# EAGLE board hw (EAGLE 9.0.0)
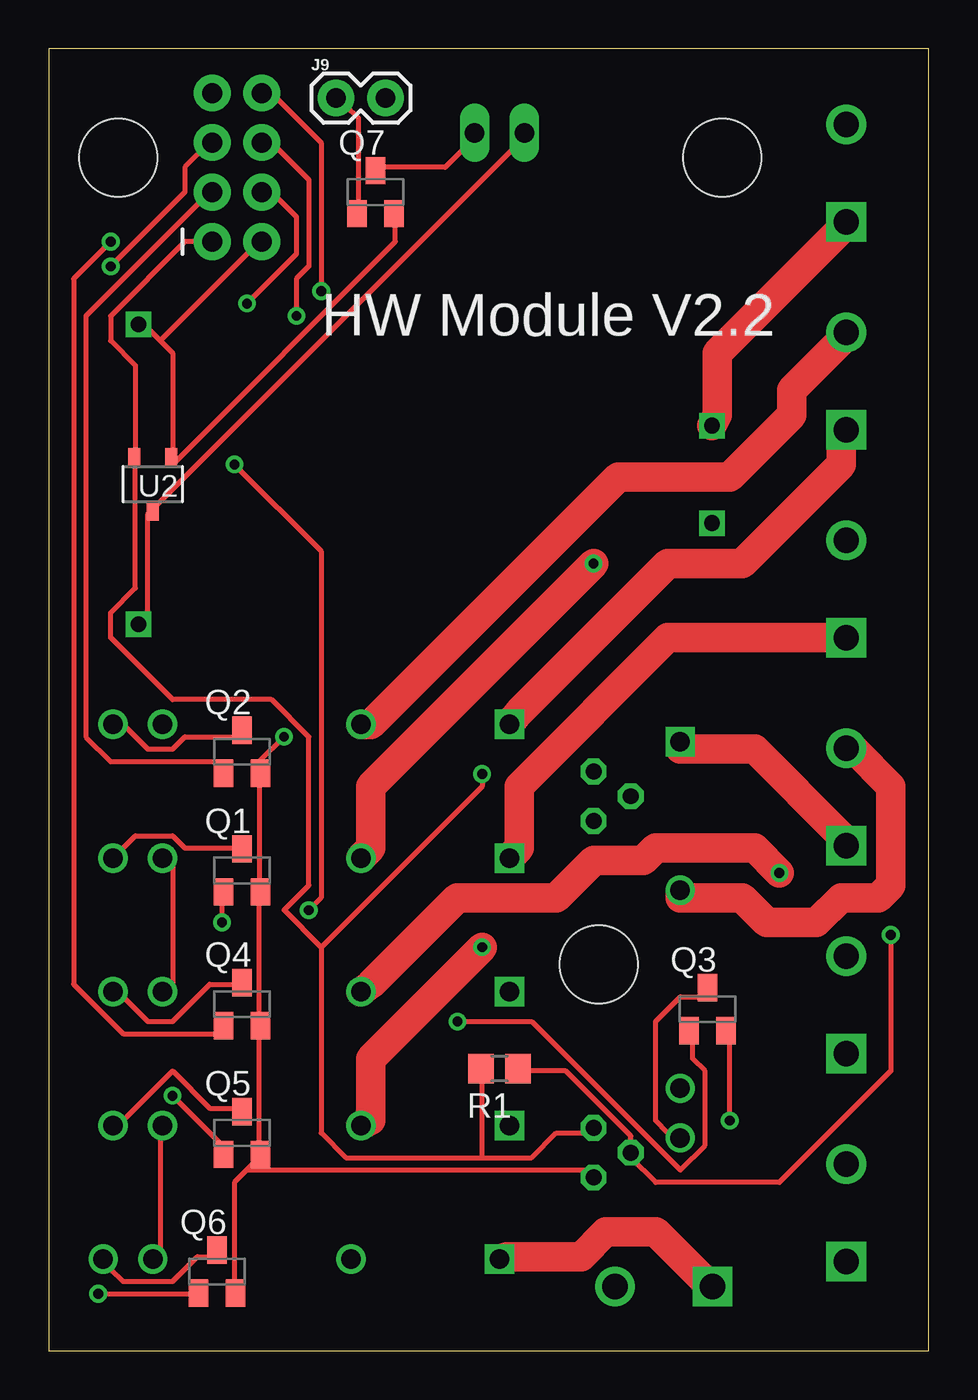
[diagram p0: board, top side]
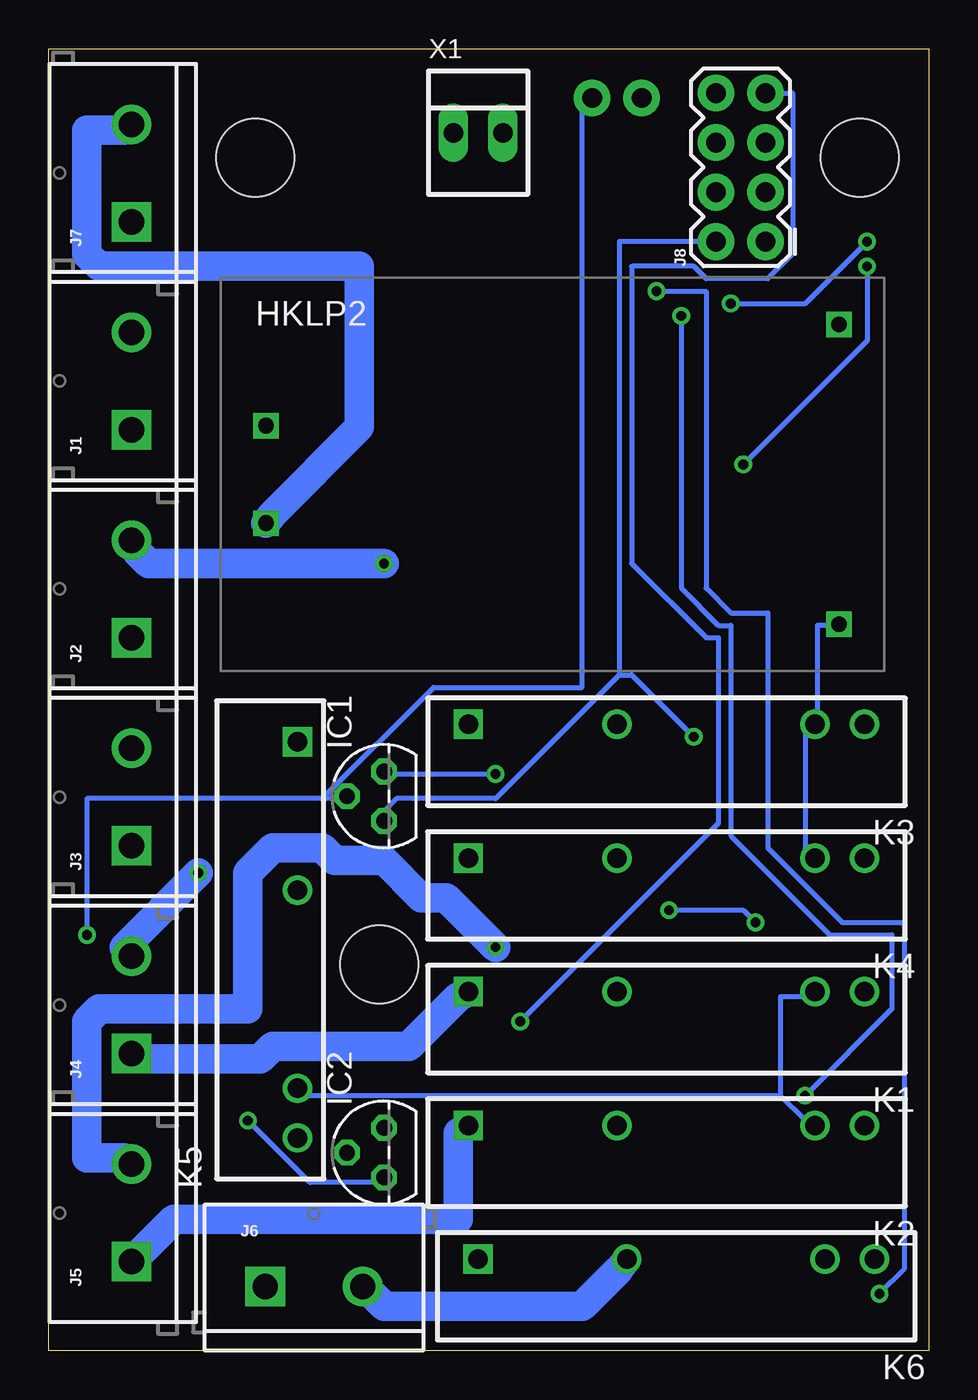
[diagram p1: board, bottom side, seen from below]

Size 45.14 x 66.79 mm. Coordinates in mm from the lower left corner, seen from the top.
Outline: 0,0 45.14,0 45.14,66.79 0,66.79 0,0
Copper layers (1*16): Top 0.035mm / dielectric 1.5mm / Bottom 0.035mm
Design rules "default *": minimum track width 6mil, minimum drill 0.5mm, track to track 6mil, track to pad 6mil, pad to pad 6mil, via to via 6mil, smd to smd 6mil, copper to edge 40mil, drill to drill 6mil, minimum pad ring 10mil, minimum via ring 8mil, stop-mask expansion 4mil, vias tented up to drill 0mil, thermal gap 10mil
Net classes: 0 default: width 0.254 mm, clearance 0.254 mm; 1 220v: width 1.524 mm, clearance 0.508 mm
Holes 4 mm at 28.19,19.81 3.56,61.21 34.54,61.21

## Footprints (pad centres in the part's own frame; a part is rotated, then mirrored left to right if it is on the bottom)
HKLPM01 = drill 0.8 square: P$1 -14.7,2.5; P$2 -14.7,-2.5; P$3 14.7,7.7; P$4 14.7,-7.7
TO-92 = drill 0.813 pad 1.27 octagon: 1 -1.27,0; 2 0,1.905; 3 1.27,0
SCREWTERMINAL-5MM-2 = drill 1.3 pad 2.032 square: 1 0,0 | drill 1.3 pad 2.032: 2 5,0
2X4 = drill 1.016 pad 1.88: 1 -3.81,-1.27; 2 -3.81,1.27; 3 -1.27,-1.27; 4 -1.27,1.27; 5 1.27,-1.27; 6 1.27,1.27; 7 3.81,-1.27; 8 3.81,1.27
1X02 = drill 1.016 pad 1.88: 1 0,0; 2 2.54,0
RELAY_G3MB-202P = drill 1 square: 1 10.16,-1.4 | drill 1: 2 2.54,-1.4; 3 -7.62,-1.4; 4 -10.16,-1.4
SOT23-BEC = smd 1 x 1.4: B -0.95,-1.1; C 0,1.1; E 0.95,-1.1
R0805 = smd 1.3 x 1.5: 1 -0.95,0; 2 0.95,0
SOT23A_MICROCHIP_CB = smd 0.6 x 1: 1 -0.95,-1.35; 2 0.95,-1.35; 3 0,1.35
22-23-2021 = drill 1 long: 1 -1.27,0; 2 1.27,0

## Placement (x,y rotation side)
HKLP2  HKLPM01  [HKLPM01]  19.3,44.96 0 bottom
IC1  DS1820  [TO-92]  27.94,28.45 90 bottom
IC2  DS1820  [TO-92]  27.94,10.16 90 bottom
J1  HEAT1  [SCREWTERMINAL-5MM-2]  40.89,47.24 90 bottom
J2  HEAT2  [SCREWTERMINAL-5MM-2]  40.89,36.58 90 bottom
J3  HEAT3  [SCREWTERMINAL-5MM-2]  40.89,25.91 90 bottom
J4  HEAT4  [SCREWTERMINAL-5MM-2]  40.89,15.24 90 bottom
J5  HEAT5  [SCREWTERMINAL-5MM-2]  40.89,4.57 90 bottom
J6  HEAT6  [SCREWTERMINAL-5MM-2]  34.04,3.3 0 bottom
J7  220_IN  [SCREWTERMINAL-5MM-2]  40.89,57.91 90 bottom
J8  [2X4]  9.65,60.71 90 bottom
J9  [1X02]  14.73,64.26 0 top
K1  G3MB-202P  [RELAY_G3MB-202P]  13.46,17.02 180 bottom
K2  G3MB-202P  [RELAY_G3MB-202P]  13.46,10.16 180 bottom
K3  G3MB-202P  [RELAY_G3MB-202P]  13.46,30.73 180 bottom
K4  G3MB-202P  [RELAY_G3MB-202P]  13.46,23.88 180 bottom
K5  G3MB-202P  [RELAY_G3MB-202P]  33.78,21.08 90 bottom
K6  G3MB-202P  [RELAY_G3MB-202P]  12.95,3.3 180 bottom
Q1  BC817-40SMD  [SOT23-BEC]  9.91,24.64 0 top
Q2  BC817-40SMD  [SOT23-BEC]  9.91,30.73 0 top
Q3  BC817-40SMD  [SOT23-BEC]  33.78,17.53 0 top
Q4  BC817-40SMD  [SOT23-BEC]  9.91,17.78 0 top
Q5  BC817-40SMD  [SOT23-BEC]  9.91,11.18 0 top
Q6  BC817-40SMD  [SOT23-BEC]  8.64,4.06 0 top
Q7  BC817-40SMD  [SOT23-BEC]  16.76,59.44 0 top
R1  4k7  [R0805]  23.11,14.48 180 top
U2  MCP1703-3302E/CB  [SOT23A_MICROCHIP_CB]  5.33,44.45 180 top
X1  22-23-2021  [22-23-2021]  23.11,62.48 0 bottom

## Library data of the parts
HKLP2 = HLKPM01EaglesLib
IC1 IC2 = DS1820
J1-J7 = SparkFun-Connectors; SF_SKU: PRT-08432
J8 J9 = SparkFun-Connectors
K1-K6 = G3MB-202P; AVAILABILITY: Unavailable; MF: Omron; MP: G3MB-202P; PACKAGE: None; PRICE: None
Q1-Q7 = transistor-npn
R1 = resistor
U2 = _hhn_MCP1703; SPICEPREFIX: U
X1 = con-molex; MF: MOLEX; MPN: 22-23-2021; OC_FARNELL: 1462926; OC_NEWARK: 25C3832

## Nets
220_GROUND0 [220v]: HKLP2.P$2 J7.2
220_GROUND1 [220v]: J1.2 K3.2
220_GROUND2 [220v]: J2.2 K4.2
220_GROUND3 [220v]: J3.2 K5.2
220_GROUND4 [220v]: J4.2 K1.2
220_GROUND5 [220v]: J5.2 K2.2
220_GROUND6 [220v]: J6.2 K6.2
220_LINE0 [220v]: HKLP2.P$1 J7.1
220_LINE1 [220v]: J1.1 K3.1
220_LINE2 [220v]: J2.1 K4.1
220_LINE3 [220v]: J3.1 K5.1
220_LINE4 [220v]: J4.1 K1.1
220_LINE5 [220v]: J5.1 K2.1
220_LINE6 [220v]: J6.1 K6.1
DQ: IC1.2 IC2.2 J9.2 R1.1
FAN_CTRL: J9.1 Q7.B
GND: HKLP2.P$3 IC1.1 IC2.1 J8.2 Q1.E Q2.E Q3.E Q4.E Q5.E Q6.E Q7.E U2.1
LINE1: J8.3 Q2.B
LINE2: J8.5 Q1.B
LINE3: J8.7 Q3.B
LINE4: J8.4 Q4.B
LINE5: J8.6 Q5.B
LINE6: J8.8 Q6.B
N$1: K2.4 Q5.C
N$3: K3.4 Q2.C
N$4: K6.4 Q6.C
N$5: K4.4 Q1.C
N$6: K5.4 Q3.C
N$7: K1.4 Q4.C
N$8: Q7.C X1.2
V3.3: IC1.3 IC2.3 J8.1 R1.2 U2.2
V5: HKLP2.P$4 K1.3 K2.3 K3.3 K4.3 K5.3 K6.3 U2.3 X1.1

## Tracks (layer width: path | path; a pad name or v marks a point on that pad's centre or on a via)
220_GROUND0
  Bottom 1.524: HKLP2.P$2 33.66,42.93 29.21,47.37 29.21,55.63 42.55,55.63 43.18,56.26 43.18,62.61 41.27,62.61 J7.2
220_GROUND1
  Top 1.524: K3.2 16.51,32.13 29.21,44.83 34.93,44.83 38.1,48.01 38.1,49.28 40.64,51.82 J1.2
220_GROUND2  (via drill 0.5)
  Top 1.524: v27.94,40.39 16.51,28.96 16.51,25.78 K4.2
  Bottom 1.524: v27.94,40.39 40.01,40.39 40.64,41.02 J2.2
220_GROUND3
  Top 1.524: K5.2 32.38,23.24 35.56,23.24 36.83,21.97 39.37,21.97 40.64,23.24 42.55,23.24 43.18,23.88 43.18,28.96 41.27,30.86 J3.2
220_GROUND4  (via drill 0.5)
  Top 1.524: v37.47,24.51 36.2,25.78 31.12,25.78 30.48,25.15 27.94,25.15 26.04,23.24 20.96,23.24 16.51,18.8 K1.2
  Bottom 1.524: v37.47,24.51 41.27,20.7 J4.2
220_GROUND5  (via drill 0.5)
  Top 1.524: v22.23,20.7 16.51,14.99 16.51,11.81 K2.2
  Bottom 1.524: v22.23,20.7 24.77,23.24 26.04,23.24 27.94,25.15 30.48,25.15 31.12,25.78 33.66,25.78 34.93,24.51 34.93,17.53 42.55,17.53 43.18,16.89 43.18,9.91 41.27,9.91 J5.2
220_GROUND6
  Bottom 1.524: K6.2 15.88,4.19 17.78,2.29 27.94,2.29 28.57,2.92 J6.2
220_LINE0
  Top 1.524: HKLP2.P$1 34.29,48.01 34.29,51.18 40.64,57.53 J7.1
220_LINE1
  Top 1.524: K3.1 24.13,32.77 31.75,40.39 35.56,40.39 40.64,45.47 40.64,46.74 J1.1
220_LINE2
  Top 1.524: J2.1 31.75,36.58 24.13,28.96 24.13,25.78 K4.1
220_LINE3
  Top 1.524: K5.1 32.38,30.86 36.2,30.86 40.64,26.42 J3.1
220_LINE4
  Bottom 1.524: K1.1 24.13,18.16 26.67,15.62 33.66,15.62 34.29,14.99 40.64,14.99 J4.1
220_LINE5
  Bottom 1.524: J5.1 38.73,6.73 24.13,6.73 24.13,11.18 K2.1
220_LINE6
  Top 1.524: K6.1 23.5,4.83 27.3,4.83 28.57,6.1 31.12,6.1 33.66,3.56 J6.1
DQ  (via drill 0.5)
  Top 0.254: v43.18,21.34 43.18,14.35 37.47,8.64 31.12,8.64 29.84,9.91 IC2.2 29.84,11.02 26.51,14.35 24.13,14.35 R1.1
  Bottom 0.254: v43.18,21.34 43.18,28.32 31.12,28.32 | 31.12,28.32 29.84,28.32 IC1.2 | 31.12,28.32 25.4,34.04 17.78,34.04 17.78,63.88 J9.2
FAN_CTRL
  Top 0.254: Q7.B 15.88,58.8 15.88,63.25 15.24,63.88 J9.1
GND  (via drill 0.5)
  Top 0.254: v34.93,11.81 34.93,16.26 Q3.E | 10.16,9.27 10.8,9.91 Q5.E 10.8,10.54 10.8,16.26 Q4.E 10.8,16.89 10.8,23.24 Q1.E 10.8,23.88 10.8,29.59 Q2.E 10.8,30.23 v12.07,31.5 | 10.16,9.27 9.52,8.64 9.52,3.56 Q6.E | 10.16,9.27 27.94,9.27 IC2.1 | 5.72,51.82 5.08,52.45 HKLP2.P$3 | 5.72,51.82 6.35,51.18 6.35,46.1 U2.1 6.35,45.47 17.78,56.9 17.78,58.17 Q7.E | 5.72,51.82 10.8,56.9 J8.2
  Bottom 0.254: v34.93,11.81 31.75,8.64 27.94,8.64 IC2.1 | 15.88,34.67 22.23,28.32 27.3,28.32 27.94,27.69 IC1.1 | 15.88,34.67 15.88,56.9 J8.2 | v12.07,31.5 15.24,34.67 15.88,34.67
LINE1
  Top 0.254: Q2.B 8.89,30.23 3.17,30.23 1.91,31.5 1.91,53.09 8.25,59.44 J8.3
LINE2  (via drill 0.5)
  Top 0.254: v8.89,21.97 8.89,23.24 Q1.B | v13.34,22.61 13.97,23.24 13.97,41.02 v9.52,45.47 | v3.17,55.63 6.99,59.44 6.99,60.71 8.25,61.98 J8.5
  Bottom 0.254: v8.89,21.97 9.52,22.61 v13.34,22.61 | v9.52,45.47 3.17,51.82 v3.17,55.63
LINE3  (via drill 0.5)
  Top 0.254: v20.96,16.89 24.77,16.89 32.38,9.27 33.66,10.54 33.66,14.35 33.02,14.99 33.02,16.26 Q3.B
  Bottom 0.254: v20.96,16.89 10.8,27.05 10.8,36.58 11.43,36.58 15.24,40.39 15.24,55.63 12.07,55.63 11.43,54.99 8.25,54.99 6.99,56.26 6.99,64.52 J8.7
LINE4  (via drill 0.5)
  Top 0.254: v3.17,56.9 1.27,54.99 1.27,18.8 3.81,16.26 8.89,16.26 Q4.B | v10.16,53.72 12.7,56.26 12.7,58.17 11.43,59.44 J8.4
  Bottom 0.254: v3.17,56.9 6.35,53.72 v10.16,53.72
LINE5  (via drill 0.5)
  Top 0.254: v6.35,13.08 8.89,10.54 Q5.B | v12.7,53.09 12.7,54.99 13.34,55.63 13.34,60.07 11.43,61.98 J8.6
  Bottom 0.254: v6.35,13.08 1.91,17.53 1.91,21.34 5.08,21.34 10.16,26.42 10.16,37.21 10.8,37.21 12.7,39.12 v12.7,53.09
LINE6  (via drill 0.5)
  Top 0.254: v2.54,2.92 7.62,2.92 Q6.B | v13.97,54.36 13.97,61.98 11.43,64.52 J8.8
  Bottom 0.254: v2.54,2.92 1.27,4.19 1.27,21.97 4.45,21.97 8.25,25.78 8.25,37.85 10.16,37.85 11.43,39.12 11.43,54.36 v13.97,54.36
N$1
  Top 0.254: Q5.C 9.52,12.45 8.25,12.45 6.35,14.35 3.81,11.81 K2.4
N$3
  Top 0.254: Q2.C 9.52,31.5 6.99,31.5 6.35,30.86 5.08,30.86 3.81,32.13 K3.4
N$4
  Top 0.254: Q6.C 8.25,4.83 7.62,4.83 6.35,3.56 3.81,3.56 3.17,4.19 K6.4
N$5
  Top 0.254: Q1.C 9.52,25.78 6.99,25.78 6.35,26.42 4.45,26.42 3.81,25.78 K4.4
N$6
  Top 0.254: Q3.C 33.66,18.16 32.38,18.16 31.12,16.89 31.12,11.81 31.75,11.18 K5.4
N$7
  Top 0.254: Q4.C 9.52,18.8 8.25,18.8 6.35,16.89 5.08,16.89 3.81,18.16 K1.4
N$8
  Top 0.254: Q7.C 17.14,60.71 20.32,60.71 21.59,61.98 X1.2
V3.3  (via drill 0.5)
  Top 0.254: J8.1 6.99,56.9 3.17,53.09 3.17,51.82 4.45,50.55 4.45,46.1 U2.2 4.45,45.47 4.45,39.12 3.17,37.85 3.17,36.58 6.35,33.4 11.43,33.4 13.34,31.5 13.34,23.88 12.07,22.61 13.97,20.7 | 22.23,9.91 15.24,9.91 13.97,11.18 13.97,20.7 | 22.23,9.91 24.77,9.91 26.04,11.18 27.94,11.18 IC2.3 | 13.97,20.7 22.23,28.96 v22.23,29.59 | 22.23,9.91 22.23,14.35 R1.2
  Bottom 0.254: v22.23,29.59 27.94,29.59 IC1.3
V5
  Top 0.254: K6.3 5.72,4.83 5.72,11.18 K2.3 | K1.3 6.35,18.8 6.35,25.15 K4.3 | 5.08,42.93 5.08,37.85 HKLP2.P$4 | 5.08,42.93 24.13,61.98 X1.1 | 5.08,42.93 U2.3
  Bottom 0.254: 7.62,13.08 31.75,13.08 K5.3 | 7.62,13.08 6.35,11.81 K2.3 | HKLP2.P$4 5.08,37.21 5.72,37.21 5.72,32.77 K3.3 6.35,32.13 6.35,25.78 K4.3 | 7.62,13.08 7.62,18.16 6.35,18.16 K1.3

## Text on the board
tNames: HW Module V2.2